# Altium PCB apt_battery_cell.PcbDoc
Units mil, origin at the board's own origin, x right, y up, seen from the top; angles counter-clockwise.
Board outline 7843 x 14370.08 mil, 2 copper layers (Top Layer, Bottom Layer); 16 components, 6 nets, 102 pads, 59 vias.
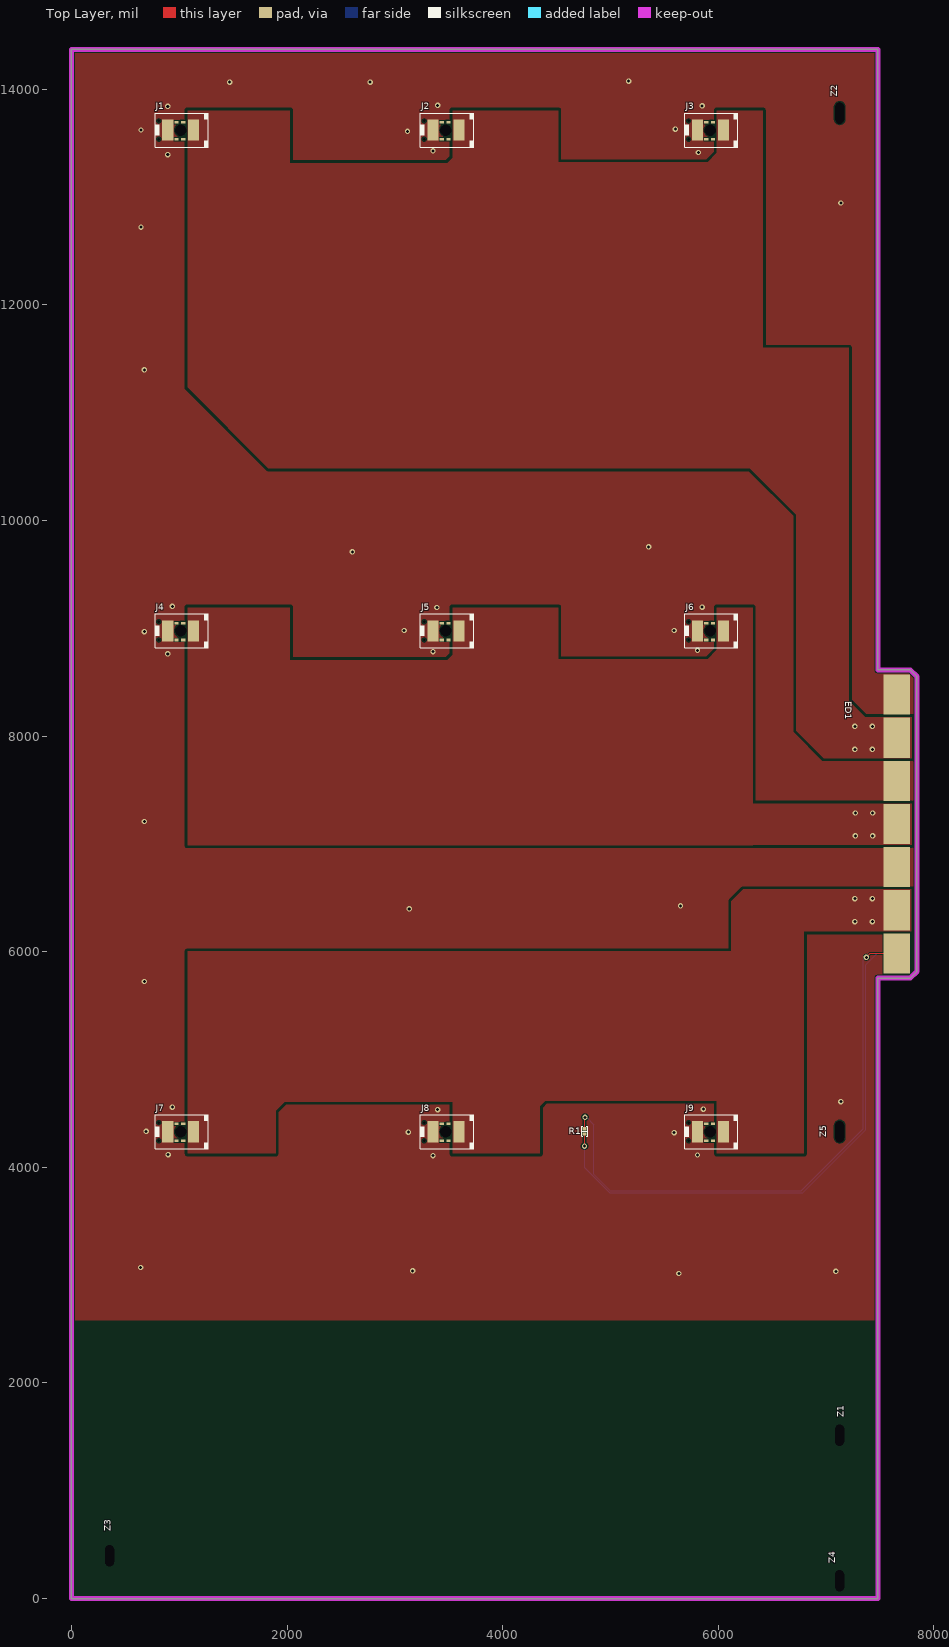
[diagram p0: Top Layer view]
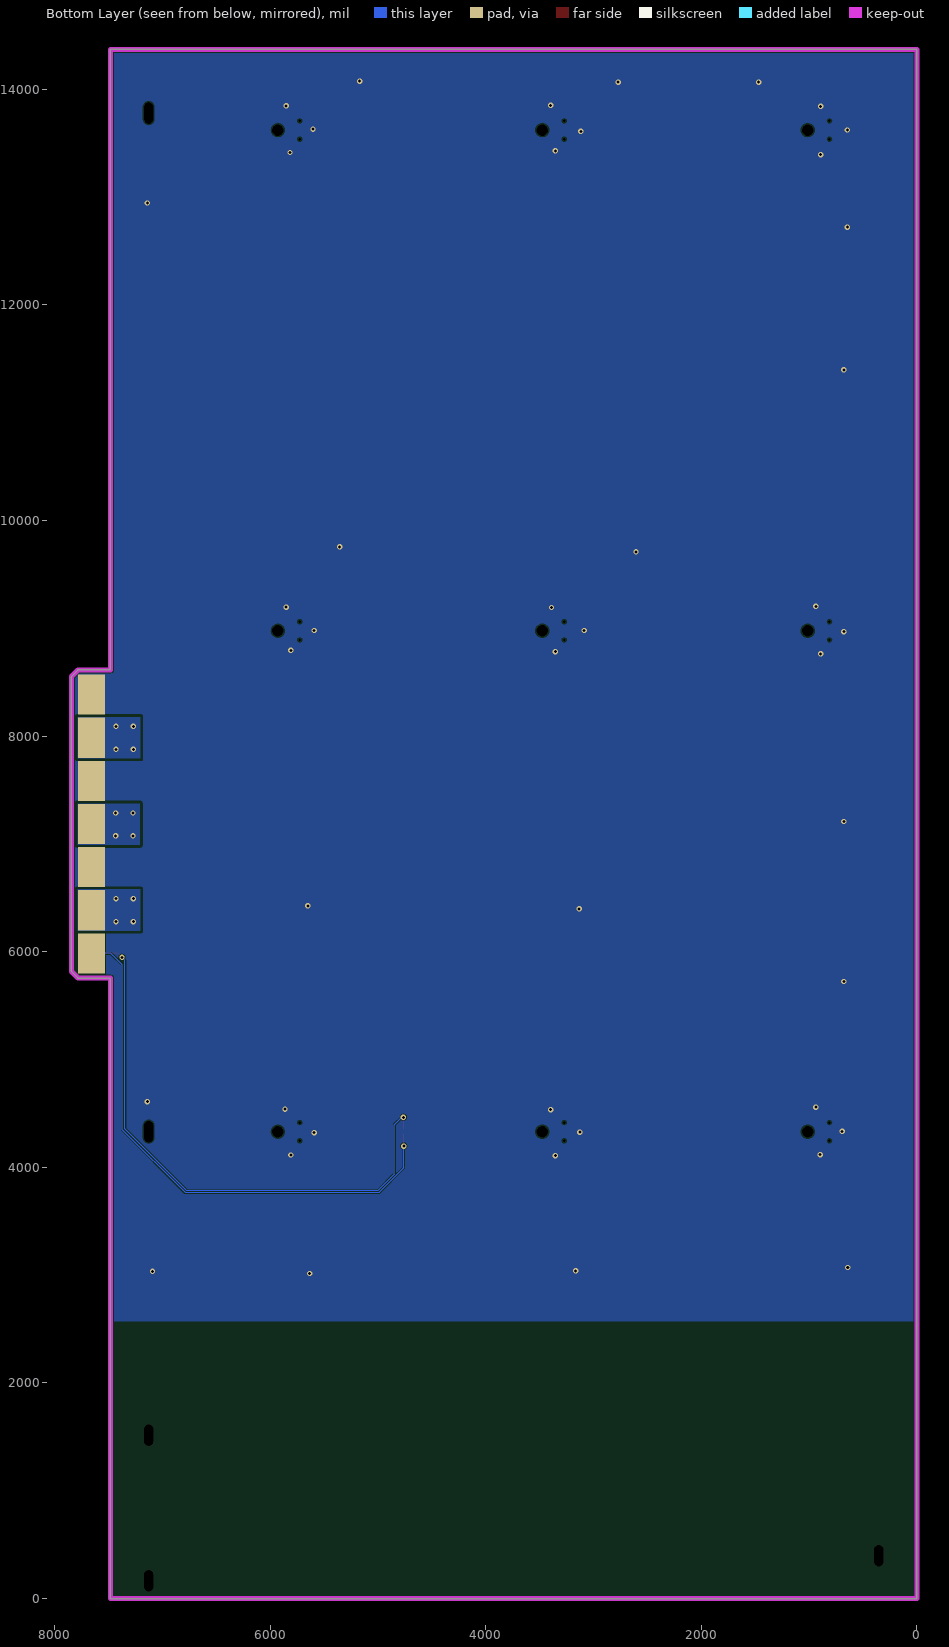
[diagram p1: Bottom Layer view, seen from below]

## Layer stack, top to bottom
Top Solder: solder mask 0.4, Solder Resist, Dk 3.5
Top Layer: signal copper 1.4
Dielectric 1: dielectric 12.6, FR-4, Dk 4.8
Bottom Layer: signal copper 1.4
Bottom Solder: solder mask 0.4, Solder Resist, Dk 3.5

## Board outline
7480.31,8614 7782,8614 7843,8553 7843,5817 7782,5756 7480.31,5756 7480.31,0 0,0 0,14370.08 3173.23,14370.08 7480.32,14370.08

## Design rules (kind name [scope] priority, off if disabled: settings)
BoardOutlineClearance [All] p1: gap=10 ignorepadtopadclearanceinfootprint=FALSE except(0: Arc-SplitContinuation Track-SplitContinuation SMDPad-SplitContinuation THPad-SplitContinuation Via-SplitContinuation Fill-SplitContinuation Poly-SplitContinuation Region-SplitContinuation Text-SplitContinuation)
Clearance [InNet('CELL_NEG')] p1: gap=10 ignorepadtopadclearanceinfootprint=FALSE except(0: Arc-Hole Track-Hole SMDPad-Hole THPad-Hole Via-Hole Text-Hole; 12: Fill-Hole Poly-Hole Region-Hole; 30: Fill-Fill Fill-Poly Fill-Region Poly-Poly Poly-Region Region-Region)
Clearance "Clearance~Sunstone Circuits" [All] p2: gap=6 ignorepadtopadclearanceinfootprint=FALSE except(0: Arc-Hole Track-Hole SMDPad-Hole THPad-Hole Via-Hole Fill-Hole Poly-Hole Region-Hole Text-Hole) // Sunstone Circuits Minimum Clearance Rule (Double Sided)
HoleSize [All] p1: absolutevalues=TRUE maxlimit=200 minlimit=10 maxpercent=80.000 minpercent=20.000
MinimumSolderMaskSliver [All] p1: minsoldermaskwidth=6
PlaneConnect [All] p1: planeconnectstyle=Direct reliefexpansion=20 reliefentries=4 reliefconductorwidth=10 reliefairgap=10
PolygonConnect [All] p1: connectstyle=Direct reliefconductorwidth=10 reliefentries=4 polygonreliefangle="90 Angle" airgapwidth=10
RoutingVias [All] p1: holewidth=28 width=50 viastyle="Through Hole" minholewidth=28 minwidth=50 maxholewidth=28 maxwidth=50
SolderMaskExpansion [All] p1: expansion=4
Width [All] p1: maxlimit=200 minlimit=10 preferedwidth=10 minimp=50.000000 maximp=50.000000 favimp=50.000000
27 further rules are at their usual default settings.

## Components (designator, comment, footprint, x,y, rotation, side; value= is the part's Value field where it differs from the comment)
ED1 "10119810-002LF - Edge Connector" "10119810-002LF - EDGE CONNECTOR" 7656,7185.04 r270 top
J1 "XBM-G028C" XBM-G028A 1013.78,13622.05 r180 top
J2 "XBM-G028C" XBM-G028A 3474.41,13622.05 r180 top
J3 "XBM-G028C" XBM-G028A 5927.17,13622.05 r180 top
J4 "XBM-G028C" XBM-G028A 1013.78,8976.38 r180 top
J5 "XBM-G028C" XBM-G028A 3474.41,8976.38 r180 top
J6 "XBM-G028C" XBM-G028A 5927.17,8976.38 r180 top
J7 "XBM-G028C" XBM-G028A 1013.78,4330.71 r180 top
J8 "XBM-G028C" XBM-G028A 3474.41,4330.71 r180 top
J9 "XBM-G028C" XBM-G028A 5927.17,4330.71 r180 top
R1 "10k" "NTC 0603_1608" 4759.84,4334.65 r90 top
Z1 "Zip tie holes" ZIP_TIE_HOLE#1 7005.5,1576.64 r270 top
Z2 "Zip tie holes" ZIP_TIE_HOLE#2 7049.61,13634.84 r270 top
Z3 "Zip tie holes" ZIP_TIE_HOLE#3 686.73,-445.62 r270 top
Z4 "Zip tie holes" ZIP_TIE_HOLE#4 6900.85,374.84 r270 top
Z5 "Zip tie holes" ZIP_TIE_HOLE#5 7394.26,4963.07 r270 top

## Footprints (in the part's own frame and the unit in brackets; to place one, negate y for a bottom-side part, rotate by r counter-clockwise, add the part's x,y. Pads: shape width x height; smd on the part's side, far side on the other; paste and mask are expansions set on the pad)
"10119810-002LF - EDGE CONNECTOR" [mm]
  rect 9.46x6.3 smd: P1-P4(30.48,0) P5-P8(20.32,0) P9-P12(10.16,0) P13-P16(0,0) P17-P20(-10.16,0) P21-P24(-20.32,0) P25-P28(-30.48,0)
  rect 9.46x6.3 smd far side: P29-P32(-30.48,0) P33-P36(-20.32,0) P37-P40(-10.16,0) P41-P44(0,0) P45-P48(10.16,0) P49-P52(20.32,0) P53-P56(30.48,0)
"NTC 0603_1608" [mm] "NTC Thermistor, 2-Leads, Body 1.60x0.80mm, IPC Medium Density"
  rect 0.8x1 smd: 1(-0.625,0) 2(0.625,0)
  silkscreen extent -1.2,-0.7 1.2,0.7, body extent -0.8,-0.41 0.8,0.41, height 0.82
XBM-G028A [mm]
  rect 2.6x5 smd mask+0.06: AB(-3.048,0) EF(3.048,0)
  rect 1x0.6 smd mask+0.05: P1(-0.62,2.15) P2(0.98,2.15) P3(-0.62,-1.85) P4(0.98,-1.85)
  round 0 hole 2.7 unplated mask+0: P8(0,0)
  round 0 hole 0.58 unplated mask+0: P11(5.143,-2.145) P11(5.143,2.145)
  silkscreen extent -6.5,-4 6,4
ZIP_TIE_HOLE#1 [mm]
  round 0 hole 2.1 slot 5 at 0 deg unplated: P15(1.547,3.06)
ZIP_TIE_HOLE#2 [mm]
  round 0 hole 2.1 slot 5 at 0 deg unplated: P15(-3.675,1.94)
ZIP_TIE_HOLE#3 [mm]
  round 0 hole 2.1 slot 5 at 0 deg unplated: P15(-21.419,-8.443)
ZIP_TIE_HOLE#4 [mm]
  round 0 hole 2.1 slot 5 at 0 deg unplated: P15(5.321,5.718)
ZIP_TIE_HOLE#5 [mm]
  round 0 hole 2.1 slot 5 at 0 deg unplated: P15(16.062,-6.814)

## Part data
ED1: Supplier Part Number 1=10119810-002LF-ND, Supplier 1=Digi-Key, System=Connector
J1 J2 J3 J4 J5 J6 J7 J8 J9: "28 pos power connector  (0.8X1.6mm pitch)-with post", Manufacturer=Neoconix, Manufacturer Part Number=XBM-G028C
R1: library part NTCS0603E3103FMT, "THERMISTOR NTC 10KOHM 3610K 0603", B Value Tolerance=±1%, Device Package="0603 (1608 Metric)", Manufacturer="Vishay BC Components", Operating Temperature="-40°C ~ 150°C", Power - Max=125mW, Supplier Part Number 1=BC2472CT-ND, B25/85=3610K, ComponentLink1Description=Datasheet, ComponentLink1URL=http://www.vishay.com/docs/29056/ntcs0603e3t.pdf, ComponentLink2Description="DigiKey Link", ComponentLink2URL=http://digikey.com/product-detail/en/vishay-bc-components/NTCS0603E3103FMT/BC2472CT-ND/2230853, LastUpdated="9/2/2020 1:22:38 AM", Lifecycle Status=Active, Minimum Order=1, Mounting Type="Surface Mount", Package / Case="0603 (1608 Metric)", Packaging=TapeAndReel, PartId=450, Part Number=NTCS0603E3103FMT, Part Status=Active, Price=0.38, Resistance in Ohms @ 25°C=10k, Resistance Tolerance=±1%, Series="Automotive, AEC-Q200", Supplier 1=DigiKey
Z1 Z2 Z3 Z4 Z5: library part ZIP_TIE_HOLE

## Via types
v1: diameter 50, hole 28, Top Layer to Bottom Layer, 59 vias

## Nets (pads, with @x,y where several pads share a name; then routed paths per layer and width w, separated by ;. In a path a pad name is that pad's centre, name@x,y a point inside that pad or via, vN(x,y) a via of type N, cw(c..) or ccw(c..) an arc to the next point about the centre after c; other vN are vias at no path point)
CELL_1+: ED1.P21-P24 ED1.P33-P36 J1.AB J2.AB J3.AB
  other v1: 7267.72,7877.95 7429.13,7877.95 7267.72,8090.55 7429.13,8090.55
CELL_2+: ED1.P13-P16 ED1.P41-P44 J4.AB J5.AB J6.AB
  other v1: 7271.65,7074.8 7433.07,7074.8 7271.65,7287.4 7433.07,7287.4
CELL_3+: ED1.P5-P8 ED1.P49-P52 J7.AB J8.AB J9.AB
  other v1: 7267.72,6279.53 7429.13,6279.53 7267.72,6492.13 7429.13,6492.13
CELL_NEG: ED1.P9-P12 ED1.P17-P20 ED1.P25-P28 ED1.P29-P32 ED1.P37-P40 ED1.P45-P48 J1.EF J2.EF J3.EF J4.EF J5.EF J6.EF J7.EF J8.EF J9.EF
  other v1: 5633.86,3015.75 7090.55,3035.43 3165.35,3039.37 641.73,3070.87 3354.41,4108.53 5807.17,4114.79 897.64,4118.11 5590.55,4322.83 3125.98,4326.77 692.91,4334.65 3397.64,4535.43 5861.7,4539.37 937.01,4559.06 7137.8,4610.24 677.17,5724.41 3133.86,6397.64 5649.61,6425.2 677.17,7208.66 893.78,8763.78 3354.41,8783.46 5807.17,8795.28 677.17,8968.5 3086.61,8980.32 5590.55,8980.32 3389.76,9192.91 5850.39,9196.85 937.01,9204.72 2606.3,9708.66 5354.33,9755.91 677.17,11397.64 645.67,12720.47 7137.8,12944.88 893.78,13393.7 5814.96,13413.39 3354.41,13429.13 3118.11,13609.28 645.67,13622.05 5602.36,13629.92 893.78,13842.52 5850.39,13846.46 3397.64,13850.39 1468.5,14066.93 2771.65,14066.93 5169.29,14074.8
NetED1_P1-P4: ED1.P1-P4 R1.2 | length 5378.6
  Top Layer w10: R1.2 4759.84,4460.63 v1(4763.78,4464.57) ; v1(7374.02,5948.82) 7410.24,5985.04 ED1.P1-P4
  Bottom Layer w10: v1(4763.78,4464.57) 4779.53,4464.57 4846.46,4397.64 4846.46,3937.01 5000,3783.46 6771.65,3783.46 7346.46,4358.27 7346.46,5921.26 v1(7374.02,5948.82)
NetED1_P53-P56: ED1.P53-P56 R1.1 | length 5122
  Top Layer w10: v1(4759.84,4196.85) R1.1
  Bottom Layer w10: v1(4759.84,4196.85) 4759.84,3996.06 4992.13,3763.78 6783.46,3763.78 7370.08,4350.39 7370.08,5879.29 7475.83,5985.04 ED1.P53-P56
pads on no net: J1.P1 J1.P2 J1.P3 J1.P4 J1.P8 J1.P11 J2.P1 J2.P2 J2.P3 J2.P4 J2.P8 J2.P11 J3.P1 J3.P2 J3.P3 J3.P4 J3.P8 J3.P11 J4.P1 J4.P2 J4.P3 J4.P4 J4.P8 J4.P11 J5.P1 J5.P2 J5.P3 J5.P4 J5.P8 J5.P11 J6.P1 J6.P2 J6.P3 J6.P4 J6.P8 J6.P11 J7.P1 J7.P2 J7.P3 J7.P4 J7.P8 J7.P11 J8.P1 J8.P2 J8.P3 J8.P4 J8.P8 J8.P11 J9.P1 J9.P2 J9.P3 J9.P4 J9.P8 J9.P11 Z1.P15 Z2.P15 Z3.P15 Z4.P15 Z5.P15

## Polygon pours and split planes (outlines as drawn)
CELL_NEG on Top Layer "Top Layer-CELL_NEG" (solid, remove dead copper, pour order 86): 0,14377.95 8236.22,14377.95 8240.16,14381.89 8240.16,2582.68 0,2582.68
CELL_3+ on Top Layer "Top Layer-CELL_3+" (solid, pour order 82): 7791.34,6578.74 7791.34,6188.98 6795.28,6188.98 6795.28,4763.78 6122.05,4763.78 6122.05,6468.5 6232.28,6578.74 6968.5,6578.74
CELL_1+ on Top Layer "Top Layer-CELL_1+" (solid, pour order 80): 7795.28,8177.17 7795.28,7795.28 6980.31,7795.28 6724.41,8051.18 6724.41,10055.12 6283.46,10496.06 6283.46,11602.36 7212.6,11602.36 7212.6,8326.77 7362.2,8177.17
CELL_2+ on Top Layer "Top Layer-CELL_2+" (solid, pour order 78): 7795.28,7374.02 7795.28,6992.13 6110.24,6992.13 6110.24,7374.02
CELL_3+ on Top Layer "Top Layer-CELL_3+ 1" (solid, pour order 76): 6795.28,4129.92 6795.28,6003.94 1078.74,6003.94 1078.74,4129.92 1893.7,4129.92 1893.7,4523.62 1980.32,4610.24 3535.43,4610.24 3535.43,4129.92 4346.46,4129.92 4346.46,4566.93 4397.64,4618.11 5988.19,4618.11 5988.19,4129.92
CELL_2+ on Top Layer "Top Layer-CELL_2+ 1" (solid, pour order 74): 1077,9192.91 1077,6988.19 6318.9,6988.19 6318.9,9192.91 5988.19,9192.91 5988.19,8799.21 5901.57,8712.6 4515.75,8712.6 4515.75,9192.91 3535.43,9192.91 3535.43,8755.91 3484.25,8704.72 2027.56,8704.72 2027.56,9192.91
CELL_1+ on Top Layer "Top Layer-CELL_1+ 1" (solid, pour order 72): 1077,13803.15 1077,11234.02 1826.77,10484.25 6413.39,10484.25 6413.39,13803.15 5988.19,13803.15 5988.19,13409.45 5901.57,13322.83 4515.75,13322.84 4515.75,13803.15 3535.43,13803.15 3535.43,13366.14 3484.25,13314.96 2027.56,13314.96 2027.56,13803.15
CELL_1+ on Top Layer "Top Layer-CELL_1+ 2" (solid, pour order 70): 1077,13728
no net on Top Layer "NONET_L01_P052" (solid, pour order 52): 2360,14640
CELL_2+ on Top Layer "CELL_2+_L01_P042" (solid, pour order 42): 2720,14640
no net on Top Layer "NONET_L01_P002" (solid, pour order 2): 840,4200
no net on Top Layer "NONET_L01_P000" (solid, pour order 0): 850,4190
CELL_NEG on Bottom Layer "Bottom Layer-CELL_NEG" (solid, remove dead copper, pour order 96): 0,14370.08 8476.38,14370.08 8476.38,2574.8 0,2574.8
CELL_1+ on Bottom Layer "Bottom Layer-CELL_1+" (solid, pour order 94): 7782,8177.17 7782,7795.28 7204.72,7795.28 7204.72,8177.17
CELL_2+ on Bottom Layer "Bottom Layer-CELL_2+" (solid, pour order 92): 7785.94,7374.02 7785.94,6992.13 7208.66,6992.13 7208.66,7374.02
CELL_3+ on Bottom Layer "Bottom Layer-CELL_3+" (solid, pour order 90): 7782,6578.74 7782,6196.85 7204.72,6196.85 7204.72,6578.74
CELL_1+ on Bottom Layer "CELL_1+_L02_P056" (solid, pour order 56): 2775,14640

## Keep-outs
Keep-Out Layer:
  lines w23.62: 7480.31,0 0,0 0,14370.08 157.48,14370.08 ; 7480.32,14370.08 5164.37,14370.08 157.48,14370.08 ; 157.48,14370.08 157.48,14370.08
  lines w47.24: 0,0 0,14370.08 3173.23,14370.08 7480.32,14370.08 7480.31,8614 7782,8614 7843,8553 7843,5817 7782,5756 7480.31,5756 7480.31,0 0,0

## Silkscreen, mask and mechanical layers (free items; w line width, h text height)
Outline:
  lines w23.62: 7480.31,0 0,0 0,14370.08 157.48,14370.08 ; 7480.32,14370.08 2311.02,14370.08 157.48,14370.08 ; 157.48,14370.08 157.48,14370.08
  lines w47.24: 0,0 0,14370.08 3173.23,14370.08 7480.32,14370.08 7480.31,8614 7782,8614 7843,8553 7843,5817 7782,5756 7480.31,5756 7480.31,0 0,0

## Dimensions
0,14370.08 to 7843,8553 on Mechanical 15
0,14370.08 to 0,0 on Mechanical 15
7480.32,14370.08 to 0,0 on Mechanical 15